# EAGLE board Elsidi (EAGLE 5.06)
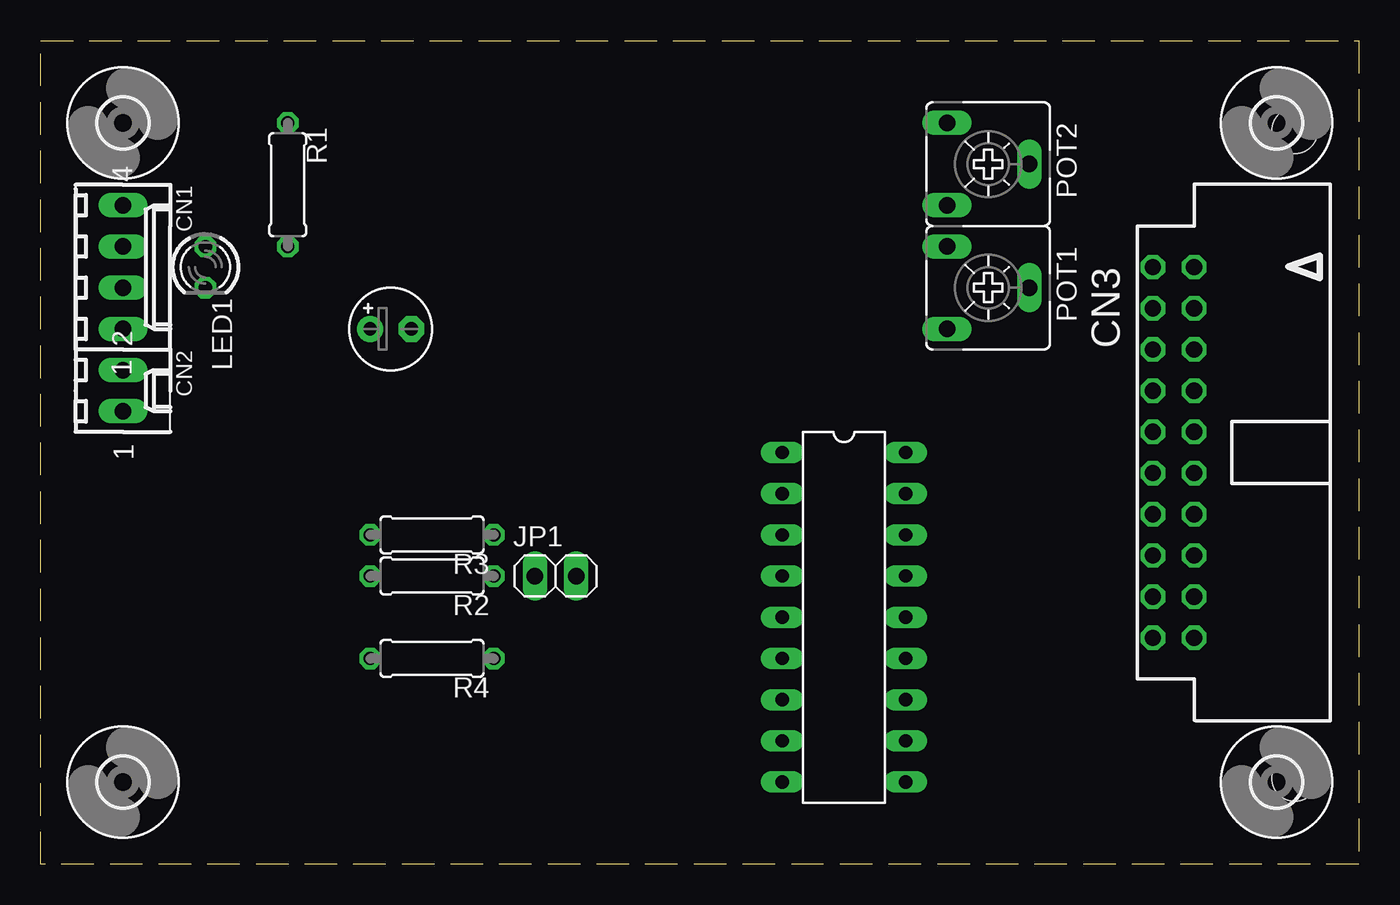
[diagram p0: board, top side]
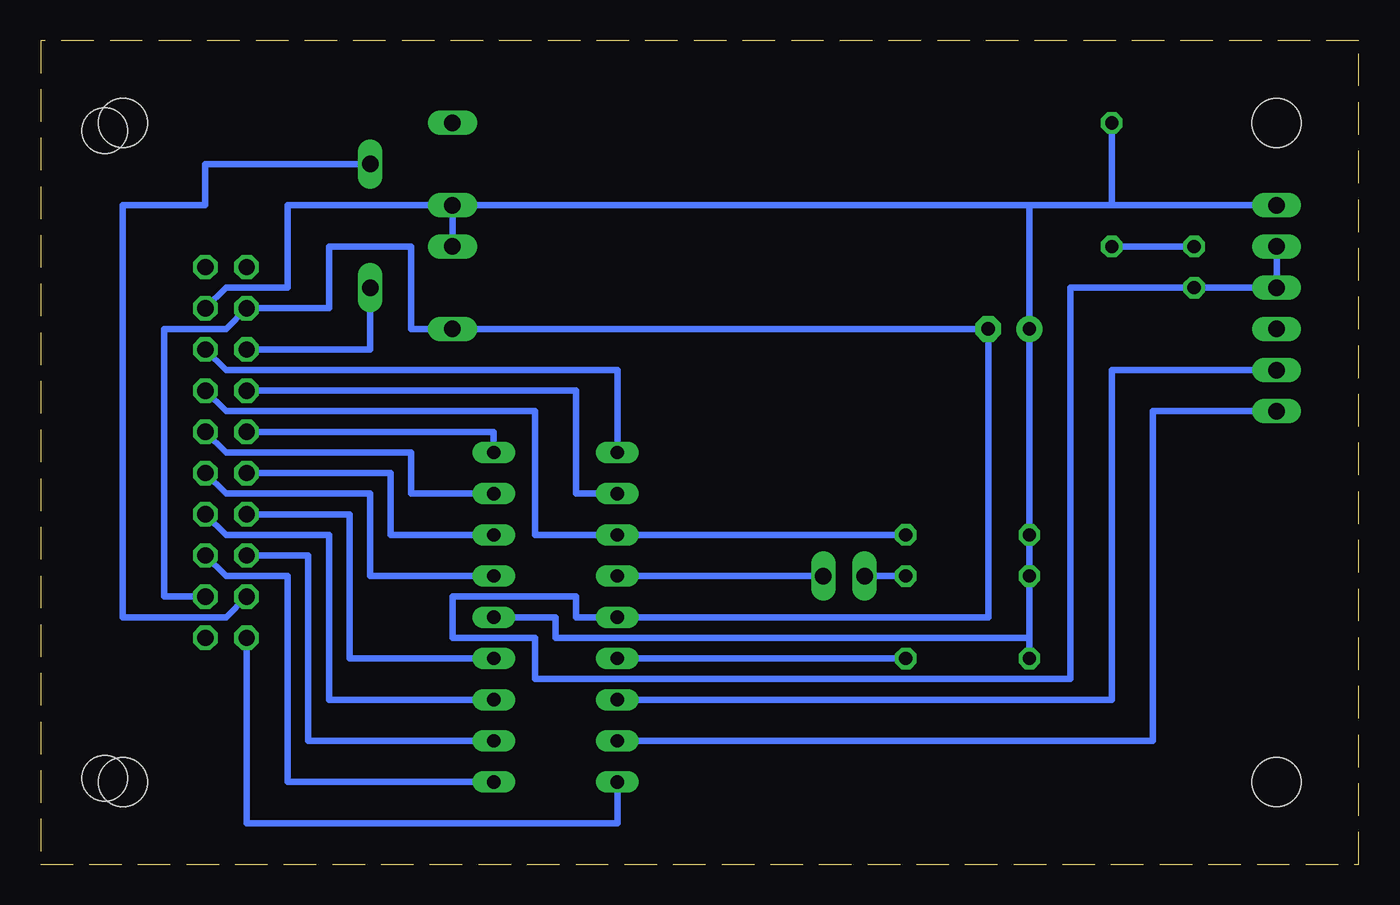
[diagram p1: board, bottom side, seen from below]

Size 81.28 x 50.8 mm. Coordinates in mm from the lower left corner, seen from the top.
Outline: 0,0 0,50.8 81.28,50.8 81.28,0 0,0
Copper layers (1*16): Top 0.035mm / dielectric 1.5mm / Bottom 0.035mm
Design rules "default": minimum track width 10mil, minimum drill 24mil, track to track 8mil, track to pad 8mil, pad to pad 8mil, via to via 8mil, smd to smd 8mil, copper to edge 40mil, drill to drill 8mil, minimum pad ring 10mil, minimum via ring 8mil, stop-mask expansion 0mil, vias tented up to drill 0mil, thermal gap 10mil

## Footprints (pad centres in the part's own frame; a part is rotated, then mirrored left to right if it is on the bottom)
6410-04 = drill 1.016 long: 1 3.81,0; 2 1.27,0; 3 -1.27,0; 4 -3.81,0
6410-02 = drill 1.016 long: 1 1.27,0; 2 -1.27,0
057-020-0 = drill 1 octagon: 1 -11.43,-5.08; 2 -11.43,-2.54; 3 -8.89,-5.08; 4 -8.89,-2.54; 5 -6.35,-5.08; 6 -6.35,-2.54; 7 -3.81,-5.08; 8 -3.81,-2.54; 9 -1.27,-5.08; 10 -1.27,-2.54; 11 1.27,-5.08; 12 1.27,-2.54; 13 3.81,-5.08; 14 3.81,-2.54; 15 6.35,-5.08; 16 6.35,-2.54; 17 8.89,-5.08; 18 8.89,-2.54; 19 11.43,-5.08; 20 11.43,-2.54 | hole 2.8: -19.83,3.66; 20.08,3.66
E2,5-5 = drill 0.813 pad 1.6 round: + -1.27,0 | drill 0.813 pad 1.6 octagon: - 1.27,0
3,0 = hole 3: 0,0
DIL18 = drill 0.813 long: 1 -10.16,-3.81; 2 -7.62,-3.81; 3 -5.08,-3.81; 4 -2.54,-3.81; 5 0,-3.81; 6 2.54,-3.81; 7 5.08,-3.81; 8 7.62,-3.81; 9 10.16,-3.81; 10 10.16,3.81; 11 7.62,3.81; 12 5.08,3.81; 13 2.54,3.81; 14 0,3.81; 15 -2.54,3.81; 16 -5.08,3.81; 17 -7.62,3.81; 18 -10.16,3.81
1X02 = drill 1.016 long: 1 -1.27,0; 2 1.27,0
LED3MM = drill 0.813 octagon: A -1.27,0; K 1.27,0
CA6V = drill 1.016 long: A -2.54,-2.54; E 2.54,-2.54; S 0,2.54
0207/7 = drill 0.813 octagon: 1 -3.81,0; 2 3.81,0

## Placement (x,y rotation side)
CN1  [6410-04]  5.08,36.83 270 top
CN2  [6410-02]  5.08,29.21 270 top
CN3  [057-020-0]  73.66,25.4 270 top
E1  10uF  [E2,5-5]  21.59,33.02 0 top
E$2  [3,0]  5.08,45.72 0 top
E$3  [3,0]  76.2,45.72 0 top
E$4  [3,0]  5.08,5.08 0 top
E$5  [3,0]  76.2,5.08 0 top
IC1  16F628  [DIL18]  49.53,15.24 270 top
JP1  [1X02]  31.75,17.78 0 top
LED1  [LED3MM]  10.16,36.83 270 top
POT1  10K  [CA6V]  58.42,35.56 270 top
POT2  5K  [CA6V]  58.42,43.18 270 top
R1  330  [0207/7]  15.24,41.91 270 top
R2  10K  [0207/7]  24.13,17.78 180 top
R3  10K  [0207/7]  24.13,20.32 180 top
R4  10K  [0207/7]  24.13,12.7 180 top

## Library data of the parts
CN1 CN2 = con-molex
CN3 = con-panduit
E1 R1-R4 = rcl
E$2-E$5 = holes
IC1 = microchip
JP1 = pinhead
LED1 = led
POT1 POT2 = pot

## Nets
+5V: CN1.4 CN3.4 E1.+ IC1.14 POT1.A POT2.E R1.1 R2.2 R3.2 R4.2
DB0: CN3.9 IC1.18
DB1: CN3.10 IC1.17
DB2: CN3.11 IC1.16
DB3: CN3.12 IC1.15
DB4: CN3.13 IC1.13
DB5: CN3.14 IC1.12
DB6: CN3.15 IC1.11
DB7: CN3.16 IC1.10
E1: CN3.8 IC1.3 R3.1
E2: CN3.19 IC1.9
GND: CN1.2 CN1.3 CN3.3 CN3.18 E1.- IC1.5 LED1.K POT1.E
LED_A: CN3.17 POT2.S
MCLR: IC1.4 JP1.2
RS: CN3.6 IC1.1
RW: CN3.7 IC1.2
RXD: CN2.2 IC1.7
S$1: LED1.A R1.2
S$2: CN2.1 IC1.8
S$3: IC1.6 R4.1
S$8: JP1.1 R2.1
V0: CN3.5 POT1.S

## Tracks (layer width: path | path; a pad name or v marks a point on that pad's centre or on a via)
+5V
  Bottom 0.406: CN3.4 69.85,35.56 66.04,35.56 66.04,40.64 POT2.E | POT2.E POT1.A | POT1.A POT2.E | POT2.E POT1.A | IC1.14 49.53,15.24 49.53,13.97 20.32,13.97 | 20.32,40.64 POT2.E | 20.32,13.97 R2.2 R3.2 E1.+ 20.32,40.64 | 20.32,40.64 15.24,40.64 | CN1.4 15.24,40.64 | 15.24,40.64 R1.1 | R4.2 20.32,13.97
DB0
  Bottom 0.406: CN3.9 53.34,26.67 IC1.18
DB1
  Bottom 0.406: CN3.10 69.85,25.4 58.42,25.4 58.42,22.86 IC1.17
DB2
  Bottom 0.406: CN3.11 59.69,24.13 59.69,20.32 IC1.16
DB3
  Bottom 0.406: CN3.12 69.85,22.86 60.96,22.86 60.96,17.78 IC1.15
DB4
  Bottom 0.406: CN3.13 62.23,21.59 62.23,12.7 IC1.13
DB5
  Bottom 0.406: CN3.14 69.85,20.32 63.5,20.32 63.5,10.16 IC1.12
DB6
  Bottom 0.406: CN3.15 64.77,19.05 64.77,7.62 IC1.11
DB7
  Bottom 0.406: CN3.16 69.85,17.78 66.04,17.78 66.04,5.08 IC1.10
E1
  Bottom 0.406: CN3.8 69.85,27.94 50.8,27.94 50.8,20.32 IC1.3 R3.1
E2
  Bottom 0.406: CN3.19 68.58,2.54 45.72,2.54 IC1.9
GND
  Bottom 0.406: CN3.18 73.66,16.51 73.66,33.02 69.85,33.02 CN3.3 63.5,34.29 63.5,38.1 58.42,38.1 58.42,33.02 POT1.E E1.- 22.86,15.24 IC1.5 48.26,15.24 48.26,16.51 55.88,16.51 55.88,13.97 50.8,13.97 50.8,11.43 17.78,11.43 17.78,35.56 LED1.K CN1.2 CN1.3
LED_A
  Bottom 0.406: CN3.17 69.85,15.24 76.2,15.24 76.2,40.64 71.12,40.64 71.12,43.18 POT2.S
MCLR
  Bottom 0.406: JP1.2 IC1.4
RS
  Bottom 0.406: CN3.6 69.85,30.48 45.72,30.48 IC1.1
RW
  Bottom 0.406: CN3.7 48.26,29.21 48.26,22.86 IC1.2
RXD
  Bottom 0.406: IC1.7 15.24,10.16 15.24,30.48 CN2.2
S$1
  Bottom 0.406: R1.2 LED1.A
S$2
  Bottom 0.406: CN2.1 12.7,27.94 12.7,7.62 IC1.8
S$3
  Bottom 0.406: R4.1 IC1.6
S$8
  Bottom 0.406: JP1.1 R2.1
V0
  Bottom 0.406: POT1.S 60.96,31.75 CN3.5